# EAGLE board Main_board_rev2 (EAGLE 7.3.0)
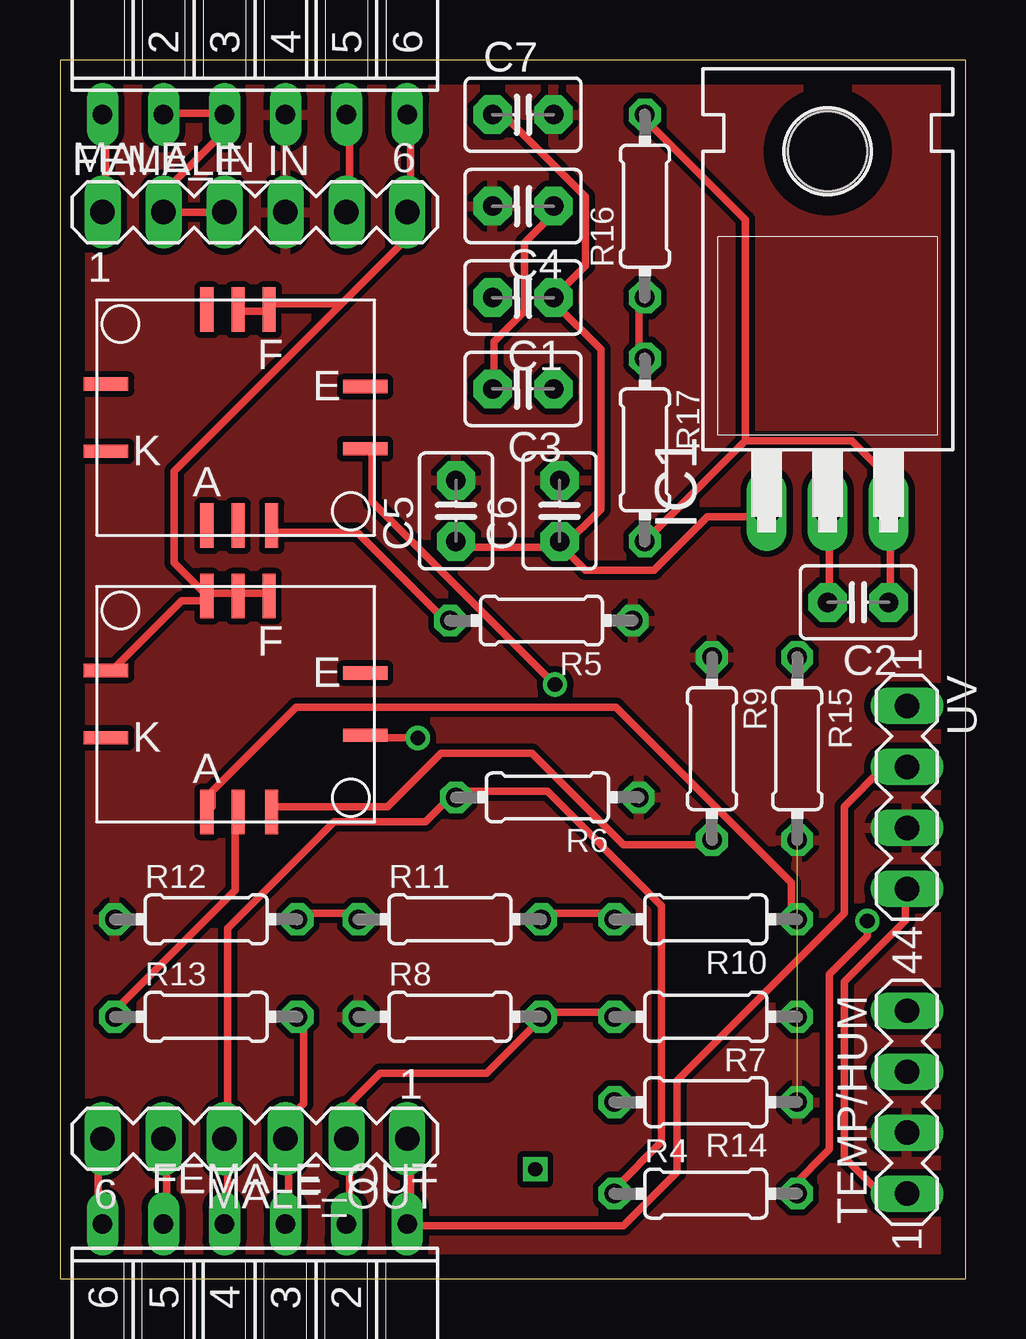
[diagram p0: board, top side]
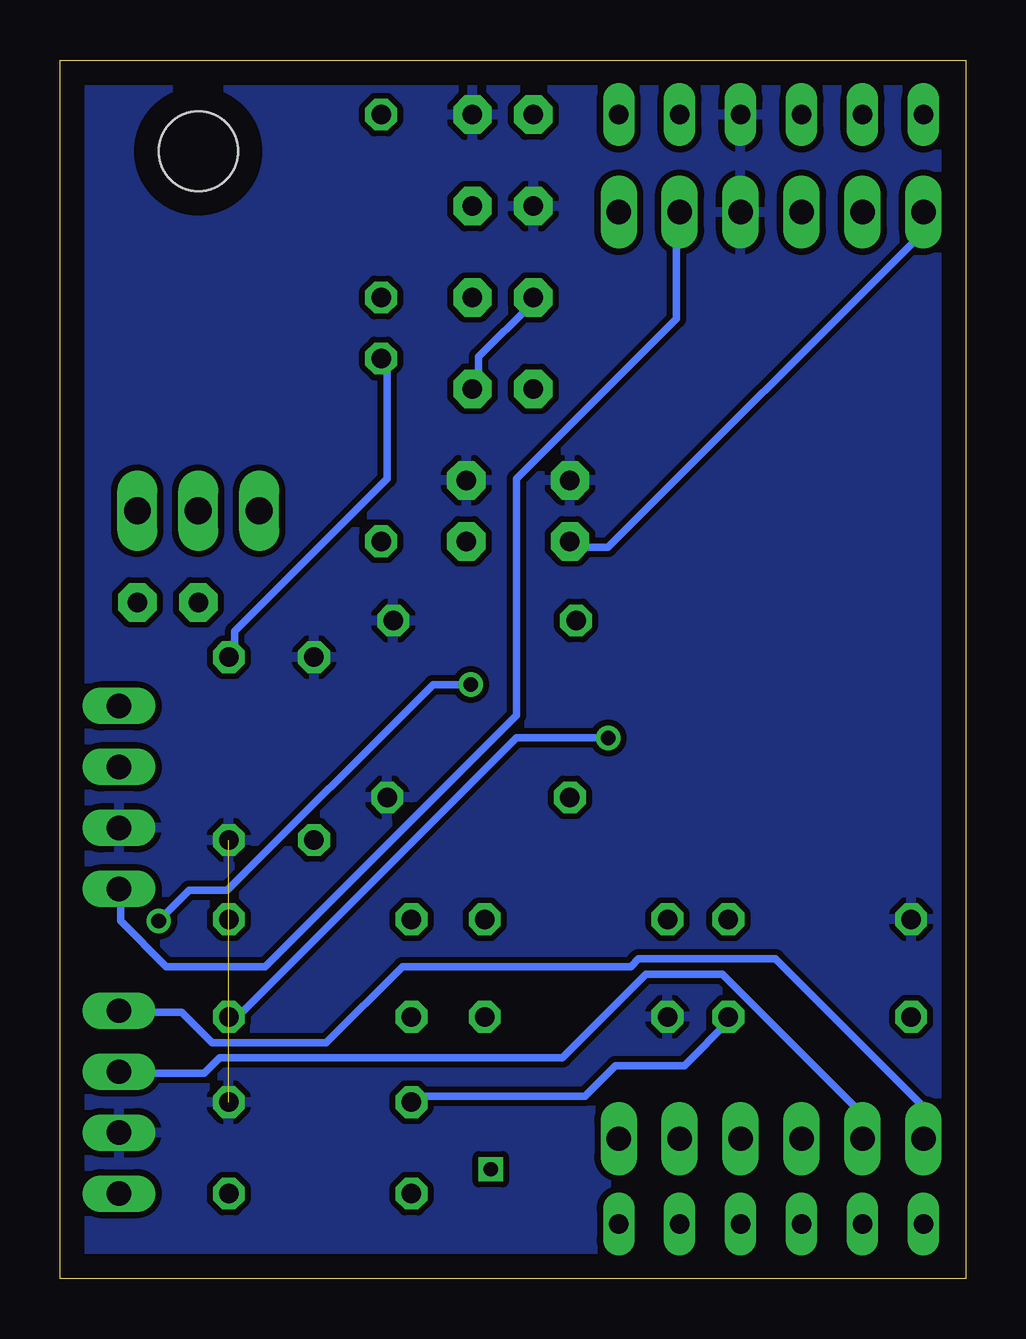
[diagram p1: board, bottom side, seen from below]

Size 37.77 x 50.79 mm. Coordinates in mm from the lower left corner, seen from the top.
Outline: 0,0 37.77,0 37.77,50.79 0,50.79 0,0
Copper layers (1*16): Top 0.035mm / dielectric 1.5mm / Bottom 0.035mm
Design rules "default": minimum track width 10mil, minimum drill 24mil, track to track 8mil, track to pad 8mil, pad to pad 8mil, via to via 8mil, smd to smd 8mil, copper to edge 40mil, drill to drill 8mil, minimum pad ring 10mil, minimum via ring 8mil, stop-mask expansion 4mil, vias tented up to drill 0mil, thermal gap 10mil
Net classes: 0 default: width 0.305 mm, drill 0.508 mm, clearance 0.254 mm

## Footprints (pad centres in the part's own frame; a part is rotated, then mirrored left to right if it is on the bottom)
MICS_SOCKET = smd 0.55 x 1.85: A 4.6,0.4; B 5.9,0.4; C 7.3,0.4; F 7.2,9.4; G 5.9,9.4; H 4.6,9.4 | smd 1.85 x 0.55: D 11.2,3.6; E 11.2,6.2; J 0.4,6.3; K 0.4,3.5
C2.5-3 = drill 0.813 pad 1.6 octagon: 1 -1.27,0; 2 1.27,0
FE06W = drill 0.813 long: 1 -6.35,0; 2 -3.81,0; 3 -1.27,0; 4 1.27,0; 5 3.81,0; 6 6.35,0
TO220H = drill 1.118 long: 1 -2.54,-10.16; 2 0,-10.16; 3 2.54,-10.16 | hole 3.302: 0,4.826
MA06-1 = drill 1.016 long: 1 -6.35,0; 2 -3.81,0; 3 -1.27,0; 4 1.27,0; 5 3.81,0; 6 6.35,0
0204/7 = drill 0.813 octagon: 1 -3.81,0; 2 3.81,0
MA04-1 = drill 1.016 long: 1 -3.81,0; 2 -1.27,0; 3 1.27,0; 4 3.81,0

## Placement (x,y rotation side)
2614  MICS_SMD  [MICS_SOCKET]  1.52,30.99 0 top
4514  MICS_SMD  [MICS_SOCKET]  1.52,19.05 0 top
C1  .1u  [C2.5-3]  19.3,40.89 180 top
C2  .1u  [C2.5-3]  33.27,28.19 180 top
C3  .1u  [C2.5-3]  19.3,37.08 180 top
C4  .1u  [C2.5-3]  19.3,44.7 180 top
C5  .1u  [C2.5-3]  16.51,32 90 top
C6  .1u  [C2.5-3]  20.83,32 90 top
C7  .1u  [C2.5-3]  19.3,48.51 0 top
FEMALE_IN  [FE06W]  8.13,48.51 0 top
FEMALE_OUT  [FE06W]  8.13,2.29 180 top
IC1  7805T  [TO220H]  32,42.16 0 top
MALE_IN  [MA06-1]  8.13,44.45 0 top
MALE_OUT  [MA06-1]  8.13,5.84 180 top
R4  820  [0204/7]  26.92,3.56 0 top
R5  82  [0204/7]  20.07,27.43 180 top
R6  100k  [0204/7]  20.32,20.07 180 top
R7  820  [0204/7]  26.92,10.92 180 top
R8  100k  [0204/7]  16.26,10.92 0 top
R9  82  [0204/7]  27.18,22.1 270 top
R10  100  [0204/7]  26.92,14.99 180 top
R11  15  [0204/7]  16.26,14.99 0 top
R12  15  [0204/7]  6.1,14.99 0 top
R13  820  [0204/7]  6.1,10.92 0 top
R14  51k  [0204/7]  26.92,7.37 180 top
R15  10k  [0204/7]  30.73,22.1 270 top
R16  10k  [0204/7]  24.38,44.7 90 top
R17  10k  [0204/7]  24.38,34.54 270 top
TEMP/HUM  [MA04-1]  35.31,7.37 90 top
UV  [MA04-1]  35.31,20.07 270 top

## Library data of the parts
2614 4514 = MiCS_socket
C1-C7 = capacitor-wima
FEMALE_IN FEMALE_OUT = con-lsta; OC_FARNELL: unknown; OC_NEWARK: unknown
IC1 = linear
MALE_IN MALE_OUT TEMP/HUM UV = con-lstb; OC_FARNELL: unknown; OC_NEWARK: unknown
R4-R14 = rcl
R15-R17 = resistor

## Nets
+5V: C1.1 C5.1 C6.1 C7.1 FEMALE_IN.1 IC1.1 MALE_IN.1
GND: C4.2 C5.2 C6.2 C7.2 FEMALE_IN.4 MALE_IN.4 R5.1 R6.1 R8.1 R9.1 R12.1 R14.1 R15.2 TEMP/HUM.2 UV.3
N$1: C2.1 IC1.3 R16.2 R17.2
N$2: C2.2 IC1.2
N$3: R15.1 R16.1 R17.1
N$4: C3.2 C4.1
N$5: C1.2 C3.1
N$6: FEMALE_OUT.4 MALE_OUT.4 R4.1 R6.2
N$7: 2614.C R5.2
N$8: FEMALE_IN.2 FEMALE_IN.3 MALE_IN.2 MALE_IN.3
N$9: 2614.D R4.2
N$10: FEMALE_OUT.2 MALE_OUT.2 R7.2 R8.2
N$11: 4514.C R9.2
N$12: 4514.D R7.1
N$13: R10.2 R11.2
N$14: R11.1 R12.2
N$15: 4514.A R10.1
N$16: FEMALE_OUT.3 MALE_OUT.3 R13.2 R14.2
N$17: 4514.B R13.1
N$18: FEMALE_OUT.1 MALE_OUT.1 UV.2
N$19: FEMALE_IN.5 MALE_IN.5 TEMP/HUM.1 UV.4
N$20: 2614.F 2614.G 4514.F 4514.G 4514.H 4514.J FEMALE_IN.6 MALE_IN.6
N$22: FEMALE_OUT.5 MALE_OUT.5 TEMP/HUM.3
N$23: FEMALE_OUT.6 MALE_OUT.6 TEMP/HUM.4

## Tracks (layer width: path | path; a pad name or v marks a point on that pad's centre or on a via)
+5V
  Top 0.305: C7.1 18.1,48.26 18.73,48.26 21.91,45.09 21.91,42.23 C1.1 20.64,40.64 22.54,38.73 22.54,32.07 20.95,30.48 | FEMALE_IN.1 1.91,48.26 1.91,44.45 MALE_IN.1 | C5.1 16.51,30.48 20.64,30.48 C6.1 20.95,30.48 | 20.95,30.48 21.91,29.53 24.77,29.53 26.99,31.75 29.21,31.75 IC1.1
  Bottom 0.305: MALE_IN.1 1.91,44.45 1.91,43.5 14.92,30.48 16.51,30.48 C5.1
GND  (1 unrouted)
  pour Top: -1.27,52.07 38.61,52.07 38.61,-1.78 -1.27,-1.78
  pour Bottom: -1.27,-0.51 38.61,-0.51 38.61,52.07 -1.27,52.07
N$1
  Top 0.305: 28.57,34.92 R17.2 | 28.57,34.92 33.02,34.92 34.29,33.66 34.29,32.07 IC1.3 34.61,31.75 34.61,28.26 C2.1 | 28.57,34.92 28.57,44.13 24.45,48.26 R16.2
N$2
  Top 0.305: C2.2 32.07,28.26 32.07,31.75 IC1.2
N$3
  Top 0.305: R16.1 24.13,40.64 24.13,38.42 R17.1
  Bottom 0.305: R15.1 30.48,26.04 30.48,26.99 24.13,33.34 24.13,38.1 R17.1
N$4
  Top 0.305: C3.2 18.1,37.15 18.1,39.05 19.37,40.32 19.37,43.18 20.64,44.45 C4.1
N$5
  Bottom 0.305: C3.1 20.32,37.15 20.32,38.42 18.1,40.64 C1.2
N$6
  Top 0.305: FEMALE_OUT.4 6.99,2.54 6.99,5.71 MALE_OUT.4 6.99,6.03 6.99,14.61 11.43,19.05 15.24,19.05 16.51,20.32 | 16.51,20.32 20.32,20.32 25.08,15.56 25.08,5.71 23.18,3.81 R4.1 | 16.51,20.32 R6.2
N$7
  Top 0.305: 2614.C 8.89,31.11 12.38,31.11 16.19,27.3 R5.2
N$8
  Top 0.305: FEMALE_IN.2 4.45,48.58 6.67,48.58 FEMALE_IN.3 6.67,48.26 6.67,47.62 4.76,45.72 4.76,44.45 | MALE_IN.3 4.76,44.45 | 4.76,44.45 MALE_IN.2 4.45,44.45
N$9  (via drill 0.61)
  Top 0.305: v20.64,24.77 13.02,32.38 13.02,34.61 2614.D | v33.66,14.92 33.66,14.29 32.07,12.7 32.07,5.4 30.48,3.81 R4.2
  Bottom 0.305: v20.64,24.77 22.23,24.77 30.8,16.19 32.38,16.19 v33.66,14.92
N$10
  Top 0.305: R7.2 22.86,11.11 20.32,11.11 R8.2 20,10.79 17.78,8.57 13.34,8.57 12.06,7.3 12.06,6.03 MALE_OUT.2 12.06,5.71 12.06,2.54 FEMALE_OUT.2
N$11
  Top 0.305: 4514.C 8.89,19.68 13.65,19.68 15.88,21.91 19.68,21.91 23.5,18.1 26.99,18.1 R9.2
N$12  (via drill 0.61)
  Top 0.305: v14.92,22.54 13.02,22.54 4514.D
  Bottom 0.305: v14.92,22.54 18.73,22.54 30.48,10.79 R7.1
N$13
  Top 0.305: R11.2 20.32,15.24 22.86,15.24 R10.2
N$14
  Top 0.305: R12.2 10.16,15.24 12.38,15.24 R11.1
N$15
  Top 0.305: 4514.A 6.35,19.68 6.35,20.32 9.84,23.81 23.18,23.81 30.48,16.51 30.48,15.24 R10.1
N$16
  Top 0.305: FEMALE_OUT.3 9.53,2.54 9.53,5.71 MALE_OUT.3 9.53,6.03 9.53,6.67 10.16,7.3 10.16,10.79 R13.2
  Bottom 0.305: R14.2 22.86,7.62 15.88,7.62 14.61,8.89 11.75,8.89 9.84,10.79 R13.2
N$17
  Top 0.305: 4514.B 7.3,19.37 7.3,16.19 2.22,11.11 R13.1
N$18
  Top 0.305: MALE_OUT.1 14.61,5.71 14.61,2.54 FEMALE_OUT.1 14.61,2.22 23.5,2.22 25.72,4.45 25.72,8.26 32.7,15.24 32.7,19.68 34.29,21.27 35.24,21.27 UV.2
N$19
  Top 0.305: FEMALE_IN.5 12.06,48.26 12.06,44.45 MALE_IN.5 | TEMP/HUM.1 35.24,3.81 33.97,3.81 32.7,5.08 32.7,12.38 35.24,14.92 35.24,16.19 UV.4
  Bottom 0.305: MALE_IN.5 12.06,44.45 12.06,40.01 18.73,33.34 18.73,23.5 29.21,13.02 33.34,13.02 35.24,14.92 35.24,16.19 UV.4
N$20
  Top 0.305: 4514.F 8.57,28.57 7.62,28.57 4514.G 7.3,28.57 6.35,28.57 4514.H | 4514.J 2.22,25.4 5.08,28.26 6.03,28.26 4514.H | 2614.G 7.62,40.32 8.57,40.32 2614.F 8.89,40.64 11.75,40.64 | 11.75,40.64 14.29,43.18 14.29,44.45 MALE_IN.6 14.61,44.45 14.61,48.26 FEMALE_IN.6 | 11.75,40.64 4.76,33.66 4.76,29.84 6.03,28.57 4514.H
N$21  (via drill 0.6)
  other vias: 19.81,4.57
N$22
  Top 0.305: FEMALE_OUT.5 4.45,2.54 4.45,5.71 MALE_OUT.5
  Bottom 0.305: TEMP/HUM.3 35.24,8.57 31.75,8.57 31.11,9.21 16.83,9.21 13.34,12.7 10.16,12.7 4.45,6.99 4.45,6.03 MALE_OUT.5
N$23
  Top 0.305: FEMALE_OUT.6 1.59,2.54 1.59,5.71 MALE_OUT.6
  Bottom 0.305: TEMP/HUM.4 35.24,11.11 32.7,11.11 31.43,9.84 26.67,9.84 23.5,13.02 13.97,13.02 13.65,13.34 7.94,13.34 1.91,7.3 1.91,6.03 MALE_OUT.6